# Altium PCB M48_CORE.PcbDoc
Units mm, origin at the board's own origin, x right, y up, seen from the top; angles counter-clockwise.
Board outline 152.4 x 101.6 mm, 2 copper layers (Top Layer, Bottom Layer); 27 components, 34 nets, 104 pads, 119 vias.
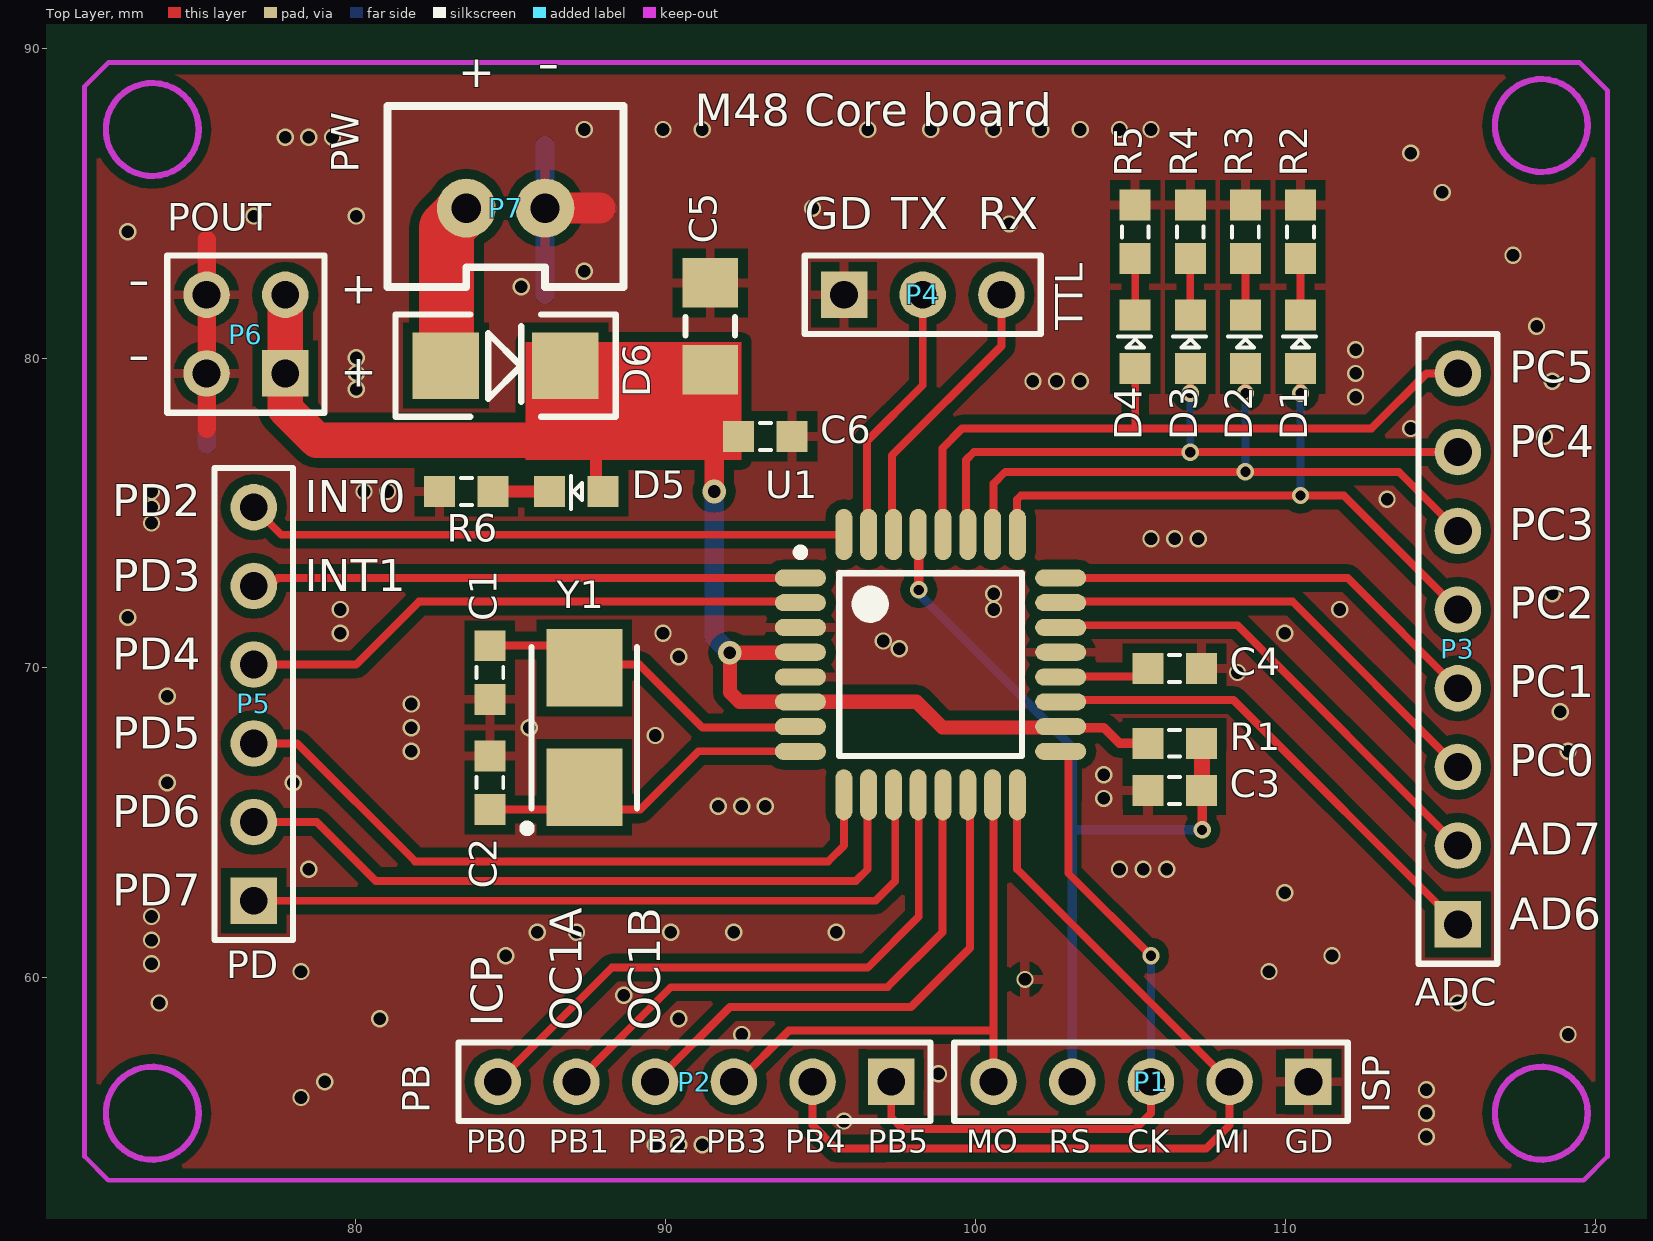
[diagram p0: Top Layer view]
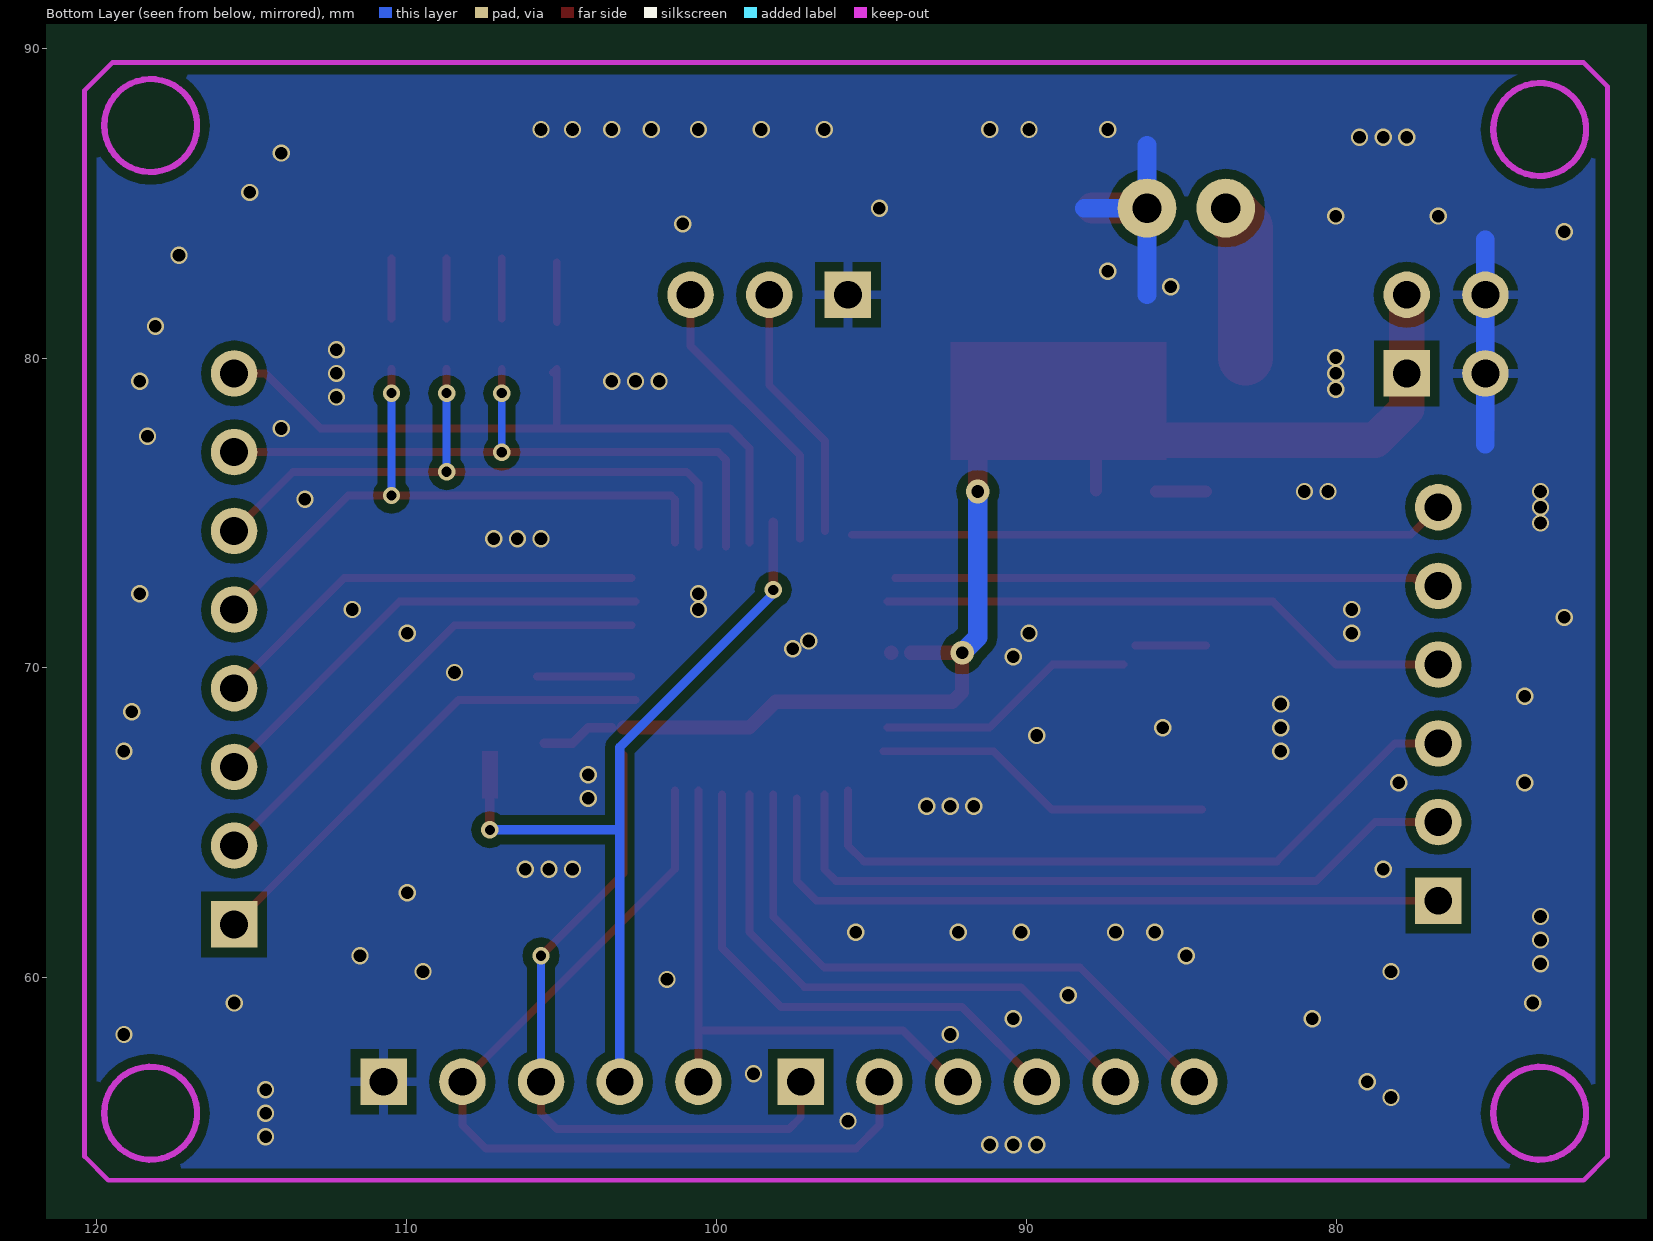
[diagram p1: Bottom Layer view, seen from below]

## Layer stack, top to bottom
Top Layer: signal copper 0.0356
Dielectric: dielectric 0.32, FR-4, Dk 4.8
Bottom Layer: signal copper 0.0356

## Board outline
25.4,25.4 177.8,25.4 177.8,127 25.4,127

## Design rules (kind name [scope] priority, off if disabled: settings)
Clearance [All] p1 off: gap=0.305
ComponentClearance [All] p1: gap=0.254 collisioncheckmode=3 verticalgap=0.254
PolygonConnect [All] p1: connectstyle=Relief reliefconductorwidth=0.305 reliefentries=4 polygonreliefangle="90 Angle"
RoutingVias [All] p1: holewidth=0.711 width=1.27 viastyle="Through Hole" minholewidth=0.203 minwidth=0.254 maxholewidth=2.032 maxwidth=2.54
SolderMaskExpansion [All] p1: expansion=0.102
TestPointUsage [All] p1: valid=0 allowmultiple=FALSE
Testpoint [All] p1: side=15 testpointundercomponent=TRUE minsize=1.016 maxsize=2.54 preferedsize=1.524 minholesize=0 maxholesize=1.016 preferedholesize=0.813 testpointgrid=0.025 style=1023 order=0123456789
Width [All] p1: maxlimit=2.54 minlimit=0.254 preferedwidth=0.254 minimp=50.000000 maximp=50.000000 favimp=50.000000
18 further rules are at their usual default settings.

## Components (designator, comment, footprint, x,y, rotation, side; value= is the part's Value field where it differs from the comment)
C1 "Cap" 0603 84.328,69.85 r270 top
C2 "Cap" 0603 84.328,66.294 r90 top
C3 "Cap" 0603 106.426,66.04 r180 top
C4 "Cap" 0603 106.426,69.977 r0 top
C5 "Cap" 3216[1206] 91.44,81.026 r270 top
C6 "Cap" 0603 93.218,77.47 r180 top
D1 "RUN" 0603-LED 110.49,80.518 r90 top
D2 "RUN" 0603-LED 108.712,80.518 r90 top
D3 "RUN" 0603-LED 106.934,80.518 r90 top
D4 "RUN" 0603-LED 105.156,80.518 r90 top
D5 "FALT" 0603-LED 87.122,75.692 r180 top
D6 "Diode" SMA 84.836,79.756 r0 top
P1 "ISP" HDR1X5 110.744,56.642 r180 top
P2 "PB" HDR1X6 97.282,56.642 r180 top
P3 "ADC" HDR1X8 115.57,61.722 r90 top
P4 "TTL" HDR1X3 95.758,82.042 r0 top
P5 "PD" HDR1X6 76.708,62.484 r90 top
P6 "POUT" HDR2X2 77.724,79.502 r90 top
P7 "PW" XH2.54-2P 83.566,84.836 r0 top
R1 "Res1" 0603 106.426,67.564 r180 top
R2 "Res1" 0603 110.49,84.074 r90 top
R3 "Res1" 0603 108.712,84.074 r90 top
R4 "Res1" 0603 106.934,84.074 r90 top
R5 "Res1" 0603 105.156,84.074 r90 top
R6 "Res1" 0603 83.566,75.692 r180 top
U1 "ATmega8-16AI" 32A_N 98.552,70.104 r0 top
Y1 "XTAL" XT5032 87.376,68.072 r90 top

## Footprints (in the part's own frame and the unit in brackets; to place one, negate y for a bottom-side part, rotate by r counter-clockwise, add the part's x,y. Pads: shape width x height; smd on the part's side, far side on the other; paste and mask are expansions set on the pad)
32A_N [mm] "Thin QFP, 32-Leads, Body 7x7mm, Pitch 0.8mm, IPC Medium Density"
  oval 1.65x0.55 smd: 1(-4.2,2.8) 2(-4.2,2) 3(-4.2,1.2) 4(-4.2,0.4) 5(-4.2,-0.4) 6(-4.2,-1.2) 7(-4.2,-2) 8(-4.2,-2.8) 17(4.2,-2.8) 18(4.2,-2) 19(4.2,-1.2) 20(4.2,-0.4) 21(4.2,0.4) 22(4.2,1.2) 23(4.2,2) 24(4.2,2.8)
  oval 0.55x1.65 smd: 9(-2.8,-4.2) 10(-2,-4.2) 11(-1.2,-4.2) 12(-0.4,-4.2) 13(0.4,-4.2) 14(1.2,-4.2) 15(2,-4.2) 16(2.8,-4.2) 25(2.8,4.2) 26(2,4.2) 27(1.2,4.2) 28(0.4,4.2) 29(-0.4,4.2) 30(-1.2,4.2) 31(-2,4.2) 32(-2.8,4.2)
  silkscreen extent -4.32,-2.95 2.95,3.75, body extent -3.5,-3.5 3.5,3.5, height 1.2
0603 [mm]
  rect 1x1 smd: 1(-0.864,0) 2(0.864,0)
  silkscreen extent -0.18,-0.43 0.18,0.43
0603-LED [mm]
  rect 1x1 smd: 1(-0.864,0) 2(0.864,0)
  silkscreen extent -0.18,-0.51 0.18,0.56
3216[1206] [mm] "Chip Resistor; Body 3.2 x 1.6 mm (LxW typ)"
  rect 1.6x1.8 smd: 1(-1.4,0) 2(1.4,0)
  silkscreen extent -0.3,-0.8 0.3,0.8
HDR1X3 [mm] "Connector; Header; 3 Position"
  rect 1.5x1.5 hole 0.9: 1(0,0)
  round 1.5 hole 0.9: 2(2.54,0) 3(5.08,0)
  silkscreen extent -1.27,-1.27 6.35,1.27
HDR1X5 [mm] "Connector; Header; 5 Position"
  rect 1.5x1.5 hole 0.9: 1(0,0)
  round 1.5 hole 0.9: 2(2.54,0) 3(5.08,0) 4(7.62,0) 5(10.16,0)
  silkscreen extent -1.27,-1.27 11.43,1.27
HDR1X6 [mm] "Connector; Header; 6 Position"
  rect 1.5x1.5 hole 0.9: 1(0,0)
  round 1.5 hole 0.9: 2(2.54,0) 3(5.08,0) 4(7.62,0) 5(10.16,0) 6(12.7,0)
  silkscreen extent -1.27,-1.27 13.97,1.27
HDR1X8 [mm] "Connector; Header; 8 Position"
  rect 1.5x1.5 hole 0.9: 1(0,0)
  round 1.5 hole 0.9: 2(2.54,0) 3(5.08,0) 4(7.62,0) 5(10.16,0) 6(12.7,0) 7(15.24,0) 8(17.78,0)
  silkscreen extent -1.27,-1.27 19.05,1.27
HDR2X2 [mm] "Connector; Header; 2x2 Position"
  rect 1.5x1.5 hole 0.9: 1(0,0)
  round 1.5 hole 0.9: 2(0,2.54) 3(2.54,0) 4(2.54,2.54)
  silkscreen extent -1.27,-1.27 3.81,3.81
SMA [mm] "Molded Diode, 2-Leads, Body 4.3x2.7mm, IPC Medium Density"
  rect 2.15x2.15 smd: 1(-1.93,0) 2(1.93,0)
  silkscreen extent -3.56,-1.65 3.56,1.65, body extent -2.28,-1.42 2.29,1.42, height 2.95
XH2.54-2P [mm]
  round 1.9 hole 0.95 paste+0: 1(0,0)
  round 1.9 hole 0.95: 2(2.54,0)
  silkscreen extent -2.54,-2.54 5.08,3.3
XT5032 [mm]
  rect 2.5x2.45 smd: 1(-1.925,0) 2(1.925,0)
  silkscreen extent -3.37,-1.7 2.6,1.97, body extent -2.58,-1.68 2.58,1.67, height 1.6

## Part data
C1 C2 C3 C4 C5 C6: "Capacitor"
D1 D2 D3 D4 D5: library part LED2, "Typical RED, GREEN, YELLOW, AMBER GaAs LED"
D6: "Default Diode"
P1: library part "Header 5", "Header, 5-Pin"
P2 P5: library part "Header 6", "Header, 6-Pin"
P3: library part "Header 8", "Header, 8-Pin"
P4: library part "Header 3", "Header, 3-Pin"
P6: library part "Header 2X2H", "Header, 2-Pin, Dual row, Right Angle"
P7: library part "Header 2", "Header, 2-Pin"
R1 R2 R3 R4 R5 R6: "Resistor"
U1: "8-Bit AVR Microcontroller with 8K Bytes of In-System Programmable Flash Memory"
Y1: "Crystal Oscillator"

## Via types
v1: diameter 0.559, hole 0.406, Top Layer to Bottom Layer, 108 vias
v2: diameter 0.559, hole 0.33, Top Layer to Bottom Layer, 9 vias
v3: diameter 0.762, hole 0.406, Top Layer to Bottom Layer, 2 vias

## Nets (pads, with @x,y where several pads share a name; then routed paths per layer and width w, separated by ;. In a path a pad name is that pad's centre, name@x,y a point inside that pad or via, vN(x,y) a via of type N, cw(c..) or ccw(c..) an arc to the next point about the centre after c; other vN are vias at no path point)
ADC6: P3.1 U1.19 | length 16
  Top Layer w0.254: U1.19@102.616,68.961 108.331,68.961 P3.1
ADC7: P3.2 U1.22 | length 15.8
  Top Layer w0.254: U1.22@102.743,71.374 108.458,71.374 P3.2
GND: C1.2 C2.2 C3.2 C4.2 C5.1 C6.1 P1.1 P4.1 P6.2 P6.4 P7.2 R2.2 R3.2 R4.2 R5.2 R6.2 U1.3 U1.5 U1.21 | length 20.8
  Top Layer w0.6: 75.184,77.724 75.184,83.82
  Top Layer w1: P7.2@86.411,84.836 87.884,84.836
  Bottom Layer w0.6: 75.184,77.216 75.184,83.82 ; 86.106,82.042 86.106,86.868 ; P7.2@86.36,84.836 88.138,84.836
  other v1: 89.662,54.61 90.424,54.61 91.186,54.61 114.554,54.864 95.758,55.372 114.554,55.626 78.232,56.134 114.554,56.388 78.994,56.642 98.806,56.896 92.456,58.166 119.126,58.166 80.772,58.674 90.424,58.674 73.66,59.182 115.57,59.182 88.646,59.436 101.6,59.944 78.232,60.198 109.474,60.198 73.406,60.452 84.836,60.706 111.506,60.706 73.406,61.214 85.852,61.468 87.122,61.468 90.17,61.468 92.202,61.468 95.504,61.468 73.406,61.976 109.982,62.738 78.486,63.5 104.648,63.5 105.41,63.5 106.172,63.5 91.694,65.532 92.456,65.532 93.218,65.532 104.14,65.786 73.914,66.294 77.978,66.294 104.14,66.548 81.788,67.31 119.126,67.31 89.662,67.818 81.788,68.072 85.598,68.072 118.872,68.58 81.788,68.834 73.914,69.088 108.458,69.85 90.424,70.358 97.536,70.612 97.028,70.866 79.502,71.12 89.916,71.12 109.982,71.12 72.644,71.628 79.502,71.882 100.584,71.882 111.76,71.882 100.584,72.39 118.618,72.39 105.664,74.168 106.426,74.168 107.188,74.168 73.406,74.676 73.406,75.184 113.284,75.438 73.406,75.692 80.264,75.692 81.026,75.692 118.364,77.47 114.046,77.724 112.268,78.74 80.01,78.994 101.854,79.248 102.616,79.248 103.378,79.248 118.618,79.248 80.01,79.502 112.268,79.502 80.01,80.01 112.268,80.264 118.11,81.026 85.344,82.296 87.376,82.804 117.348,83.312 72.644,84.074 101.092,84.328 76.708,84.582 80.01,84.582 94.742,84.836 115.062,85.344 114.046,86.614 77.724,87.122 78.486,87.122 79.248,87.122 87.376,87.376 89.916,87.376 91.186,87.376 96.52,87.376 98.552,87.376 100.584,87.376 102.108,87.376 103.378,87.376 104.648,87.376 105.664,87.376
MISO: P1.2 P2.2 U1.16 | length 29.1
  Top Layer w0.254: P2.2 94.742,55.245 95.504,54.483 107.442,54.483 108.204,55.245 P1.2 101.346,63.5 U1.16@101.346,66.04
MOSI: P1.5 P2.3 U1.15 | length 18.3
  Top Layer w0.254: P2.3@92.329,56.642 93.98,58.293 100.584,58.293 ; P1.5 U1.15@100.584,66.04
NetC1_1: C1.1 U1.7 Y1.2 | length 10.7
  Top Layer w0.254: C1.1@84.201,70.719 Y1.2@86.487,70.719 ; Y1.2@86.868,70.104 89.154,70.104 91.186,68.072 U1.7@94.488,68.072
NetC2_1: C2.1 U1.8 Y1.1 | length 11.1
  Top Layer w0.254: C2.1 89.179,65.43 91.059,67.31 U1.8@94.615,67.31
NetC4_1: C4.1 U1.20 | length 3
  Top Layer w0.254: U1.20@102.752,69.723 C4.1@105.791,69.723
NetD1_2: D1.2 R2.1 | length 1.9
  Top Layer w0.254: D1.2@110.49,81.28 R2.1
NetD2_2: D2.2 R3.1 | length 1.9
  Top Layer w0.254: D2.2@108.712,81.28 R3.1
NetD3_2: D3.2 R4.1 | length 1.9
  Top Layer w0.254: D3.2@106.934,81.28 R4.1
NetD4_2: D4.2 R5.1 | length 1.9
  Top Layer w0.254: D4.2@105.156,81.153 R5.1@105.156,83.083
NetD5_2: D5.2 R6.1 | length 1.6
  Top Layer w0.381: R6.1@84.201,75.692 D5.2@85.827,75.692
NetD6_1: D6.1 P7.1 | length 5.1
  Top Layer w1.778: D6.1@82.931,80.01 82.931,84.201 P7.1
PB0/ICP: P2.6 U1.12 | length 19.7
  Top Layer w0.254: P2.6 88.265,60.325 96.52,60.325 98.171,61.976 U1.12@98.171,65.913
PB1/OC1A: P2.5 U1.13 | length 18.3
  Top Layer w0.254: P2.5 90.17,59.69 97.155,59.69 98.933,61.468 U1.13@98.933,65.913
PB2/OC1B: P2.4 U1.14 | length 16.9
  Top Layer w0.254: P2.4 92.075,59.055 97.917,59.055 99.822,60.96 U1.14@99.822,65.913
PC0/ADC0: P3.3 U1.23 | length 15.2
  Top Layer w0.254: U1.23@102.616,72.136 110.236,72.136 P3.3
PC1: P3.4 U1.24 | length 14.3
  Top Layer w0.254: U1.24@102.743,72.898 112.014,72.898 P3.4
PC2: D1.1 P3.5 U1.25 | length 21.3
  Top Layer w0.254: U1.25@101.346,74.041 101.346,75.438 101.473,75.565 111.887,75.565 P3.5 ; v2(110.49,78.867) D1.1
  Bottom Layer w0.254: v2(110.49,75.565) v2(110.49,78.867)
PC3: D2.1 P3.6 U1.26 | length 21.3
  Top Layer w0.254: U1.26@100.584,73.914 100.584,75.946 100.965,76.327 113.665,76.327 P3.6 ; v2(108.712,78.867) D2.1
  Bottom Layer w0.254: v2(108.712,76.327) v2(108.712,78.867)
PC4: D3.1 P3.7 U1.27 | length 21.5
  Top Layer w0.254: U1.27@99.695,73.914 99.695,76.708 99.949,76.962 P3.7 ; v2(106.934,78.867) D3.1
  Bottom Layer w0.254: v2(106.934,76.962) v2(106.934,78.867)
PC5: D4.1 P3.8 U1.28 | length 23.1
  Top Layer w0.254: U1.28@98.937,74.304 98.933,74.041 98.933,77.089 99.568,77.724 112.776,77.724 114.554,79.502 P3.8 ; 105.156,77.724 D4.1 D4.1@105.283,79.527
PD2/INT0: P5.6 U1.32 | length 19.3
  Top Layer w0.254: P5.6 77.597,74.295 U1.32@95.631,74.295
PD3/INT1: P5.5 U1.1 | length 17.3
  Top Layer w0.254: P5.5@77.089,72.517 77.47,72.898 U1.1@94.234,72.898
PD4: P5.4 U1.2 | length 18.6
  Top Layer w0.254: P5.4 80.01,70.104 82.042,72.136 U1.2@94.488,72.136
PD5: P5.3 U1.9 | length 22.6
  Top Layer w0.254: P5.3 78.105,67.564 81.915,63.754 95.25,63.754 95.758,64.262 U1.9@95.758,66.04
PD6: P5.2 U1.10 | length 23.2
  Top Layer w0.254: P5.2 78.74,65.024 80.645,63.119 96.139,63.119 96.52,63.5 U1.10@96.52,65.913
PD7: P5.1 U1.11 | length 23.6
  Top Layer w0.254: P5.1 96.774,62.484 97.409,63.119 U1.11@97.409,65.786
RST: C3.1 P1.4 R1.1 U1.29 | length 25.4
  Top Layer w0.305: v2(98.171,72.517) U1.29@98.171,74.695 ; v2(107.315,64.77) C3.1@107.315,65.859
  Bottom Layer w0.305: v2(98.171,72.517) 98.171,72.39 103.124,67.437 P1.4 ; 103.124,64.77 v2(107.315,64.77)
RXD: P4.3 U1.30 | length 9.1
  Top Layer w0.254: U1.30@97.302,74.168 97.302,76.855 100.838,80.391 P4.3@100.838,81.788
SCK: P1.3 P2.1 U1.17 | length 22.6
  Top Layer w0.254: P2.1 97.282,55.499 97.663,55.118 105.156,55.118 105.664,55.626 P1.3 ; U1.17@102.997,67.183 102.997,63.373 v2(105.664,60.706)
  Bottom Layer w0.254: P1.3 v2(105.664,60.706)
TXD: P4.2 U1.31 | length 8.1
  Top Layer w0.254: U1.31@96.5,74.422 96.5,77.323 98.298,79.121 P4.2@98.298,81.788
VCC: C5.2 C6.2 D5.1 D6.2 P6.1 P6.3 R1.2 U1.4 U1.6 U1.18 | length 42.5
  Top Layer w0.305: U1.18@103.378,68.072 104.14,68.072 104.648,67.564 R1.2
  Top Layer w0.381: D5.1@87.757,75.717 87.757,77.343
  Top Layer w0.457: U1.4@93.726,70.485 v3(92.075,70.485) 92.075,69.215 92.386,68.904 98.101,68.904 98.933,68.072 U1.18@102.997,68.072 ; U1.4@94.352,70.485 U1.4@94.361,70.485
  Top Layer w0.635: v3(91.567,75.692) 91.567,76.835
  Top Layer w1.143: P6.3 77.724,78.359 78.74,77.343 91.186,77.343
  Bottom Layer w0.635: v3(91.567,75.692) 91.567,70.993 v3(92.075,70.485)

## Polygon pours and split planes (outlines as drawn)
GND on Top Layer "Bottom Layer-No Net" (solid, remove dead copper): 96.012,67.31 108.712,67.31 109.728,66.294 109.982,66.04 109.982,53.848 97.155,53.848 96.52,54.483
GND on Top Layer "Bottom Layer-No Net" (solid, remove dead copper): 60.96,91.059 121.412,91.059 123.825,93.472 122.809,92.456 122.809,51.689 68.834,51.689 67.183,50.038
GND on Bottom Layer "Bottom Layer-No Net" (solid, remove dead copper): 63.373,95.25 66.294,92.329 125.857,92.329 125.857,52.324 121.666,48.133 119.507,50.292 64.77,50.292
GND on Bottom Layer "Bottom Layer-No Net" (solid, remove dead copper): 58.674,94.361 59.182,94.869 126.111,94.869 126.111,52.832 122.047,48.768 121.031,47.752 67.945,47.752

## Keep-outs
Keep-Out Layer:
  circle w0.2: c73.43,55.626 r1.5
  circle w0.2: c118.261,87.503 r1.5
  circle w0.2: c73.43,87.376 r1.5
  circle w0.2: c118.261,55.626 r1.5
  lines w0.152: 71.247,54.229 72.009,53.467 119.634,53.467 120.396,54.229 120.396,88.646 119.507,89.535 72.009,89.535 71.247,88.773 71.247,54.229

## Other copper
Top Layer:
  rectangle net RST: 107.061,65.786 107.569,67.31
  rectangle net VCC: 85.471,76.708 92.456,80.518

## Silkscreen, mask and mechanical layers (free items; w line width, h text height)
Top Overlay:
  text "+" at 83.312,88.392 h1.78
  text "-" at 85.852,88.392 h2.54
  text "M48 Core board" at 90.932,87.122 h1.8
  text "GD" at 94.488,83.82 h1.78
  text "TX" at 97.282,83.82 h1.78
  text "RX" at 100.076,83.82 h1.78
  text "-" at 72.644,81.407 h2.54
  text "+" at 79.502,81.407 h1.78
  text "-" at 72.644,78.994 h2.54
  text "PC5" at 117.221,78.867 h1.78
  text "+" at 79.502,78.74 h1.78
  text "PC4" at 117.221,76.454 h1.78
  text "INT0" at 78.359,74.676 h1.78
  text "PD2" at 72.136,74.549 h1.78
  text "PC3" at 117.221,73.787 h1.78
  text "PD3" at 72.136,72.136 h1.78
  text "INT1" at 78.359,72.136 h1.78
  text "PC2" at 117.221,71.247 h1.78
  text "PD4" at 72.136,69.596 h1.78
  text "PC1" at 117.221,68.707 h1.78
  text "PD5" at 72.136,67.056 h1.78
  text "PC0" at 117.221,66.167 h1.78
  text "PD6" at 72.136,64.516 h1.78
  text "AD7" at 117.221,63.627 h1.78
  text "PD7" at 72.136,61.976 h1.78
  text "AD6" at 117.221,61.214 h1.78
  text "ICP" at 85.09,58.42 h1.78 r90
  text "OC1A" at 87.63,58.293 h1.78 r90
  text "OC1B" at 90.17,58.293 h1.78 r90
  text "PB0" at 83.566,54.102 h1.27
  text "PB1" at 86.233,54.102 h1.27
  text "PB2" at 88.773,54.102 h1.27
  text "PB3" at 91.313,54.102 h1.27
  text "PB4" at 93.853,54.102 h1.27
  text "PB5" at 96.52,54.102 h1.27
  text "MO" at 99.695,54.102 h1.27
  text "RS" at 102.362,54.102 h1.27
  text "CK" at 104.902,54.102 h1.27
  text "MI" at 107.696,54.102 h1.27
  text "GD" at 109.982,54.102 h1.27